# Allegro board AAF_TRANSFER_PCB.brd
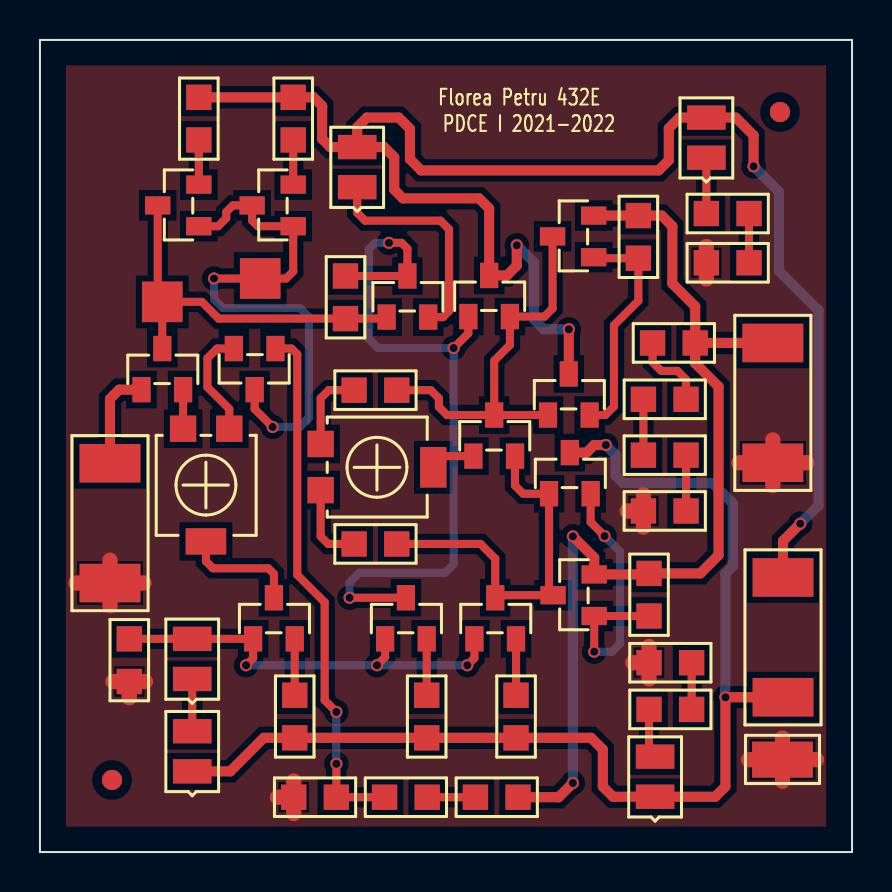
[diagram p0: board, top side]
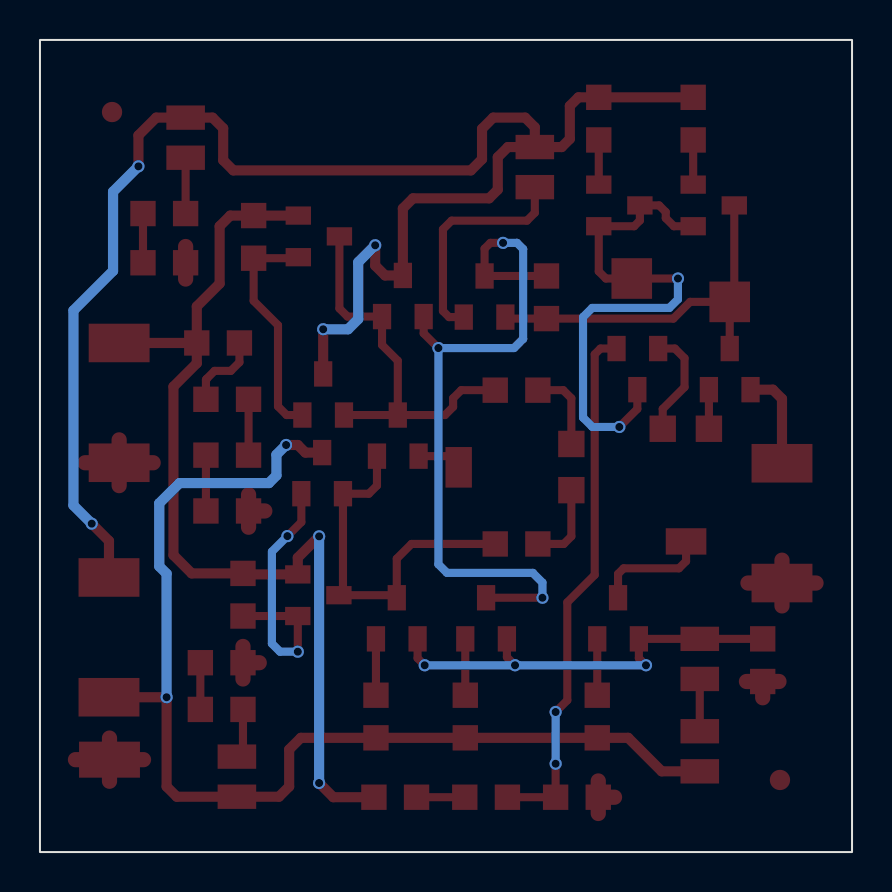
[diagram p1: board, bottom side, seen from below]

Outline 40.64 x 40.64 mm; copper layers: TOP, BOTTOM. Coordinates in mm from the lower left corner of the outline.
Outline path: rectangle 0,0 40.64,40.64

## Design rules (mm)
nets with their own width: min track width 0.406; nets N00911 N00918 N00925 N00933 N01224 N01228 N01235 N01242 N01246 N01250 N01277 N01281 N01296 N01395 N01399 N01446 N01522 N02165 N02372 N02396 N02732 N02736 N02740 N16944 N16948 N16962 N039361 N039811 N042490 N126500
nets with their own width: min track width 0.508; nets VCC VEE VIN VOUT
nets with their own width: min track width 0.762; nets GND

## Placement (name value [footprint] x y rotation side)
C1  47p  [SMC0805]  15.29 26.7 90 top
D1  1N4148  [SMD0805]  7.62 8.66 90 top
D2  1N4148  [SMD0805]  7.62 4.04 90 top
D3  1N4148  [SMD0805]  15.88 33.27 90 top
GND  CON1  [SMD_PAD_3-05_1-80#2]  37.16 4.62 0 top
LED1  OF-SMD2012B  [SMD0805]  33.35 34.75 90 top
LED2  OF-SMD2012B  [SMD0805]  30.78 2.77 90 top
NOREF  -  [unnamed]  3.61 3.61 0 top
NOREF#2  -  [#2]  40.64 0 90 top
NOREF#3  -  [#2]  0 40.64 0 top
NOREF#4  -  [unnamed]  37.03 37.03 0 top
PSU  CON2  [SMR2512]  37.19 13.74 270 top
Q1  QBC846B  [TO236AB]  5.08 23.14 270 top
Q2  QBC846B  [TO236AB]  11.79 25.2 90 top
Q3  QBC856B  [TO236AB]  17.35 26.77 270 top
Q4  QBC846B  [TO236AB]  21.44 26.8 270 top
Q5  QBC856B  [TO236AB]  7.95 31.32 0 top
Q6  QBC856B  [TO236AB]  12.67 31.32 0 top
Q7  QBC846B  [TO236AB]  10.67 10.67 270 top
Q8  QBC846B  [TO236AB]  17.27 10.67 270 top
Q9  QBC846B  [TO236AB]  21.74 10.67 270 top
Q10  QBC846B  [TO236AB]  21.69 19.81 270 top
Q11  QBC846B  [TO236AB]  27.71 29.77 0 top
Q12  QBC856B  [TO236AB]  27.74 11.81 0 top
Q13  QBC817-25  [TO236AB]  25.43 21.87 270 top
Q14  QBC807-25  [TO236AB]  25.48 17.93 270 top
R1  220  [SMR0805]  21.79 2.74 0 top
R2  680  [SMR0805]  17.25 2.74 0 top
R3  100  [SMR0805]  14.83 2.74 180 top
R4  51  [SMR0805]  7.95 37.77 270 top
R5  51  [SMR0805]  12.67 37.77 270 top
R6  100  [TS53YL]  7.16 21.18 90 top
R7  1k  [SMR0805]  12.75 7.85 270 top
R8  510  [SMR0805]  19.35 7.85 270 top
R9  220  [SMR0805]  23.83 7.85 270 top
R10  1  [SMR0805]  29.95 29.72 90 top
R11  1  [SMR0805]  30.48 13.94 270 top
R12  220  [SMR0805]  15.72 23.11 0 top
R13  500  [TS53YL]  14.05 18.11 180 top
R14  220  [SMR0805]  17.86 15.42 180 top
R15  2.2k  [SMR0805]  4.47 8.53 90 top
R16  10  [SMR0805]  32.79 25.48 180 top
R17  10  [SMR0805]  30.2 22.66 0 top
R18  10  [SMR0805]  30.2 19.86 0 top
R19  10  [SMR0805]  30.2 17.07 0 top
R20  220  [SMR0805]  33.35 31.95 0 top
R21  220  [SMR0805]  35.48 29.49 180 top
R22  220  [SMR0805]  32.61 7.14 180 top
R23  220  [SMR0805]  30.48 9.47 0 top
TS1  J5  [SMD_PAD_3-05_1-80]  6.12 27.53 0 top
TS2  J6  [SMD_PAD_3-05_1-80]  11.02 28.7 0 top
VIN  J1  [SMR2512]  3.51 19.46 270 top
VOUT  J2  [SMR2512]  36.68 25.48 270 top

## Library data of the parts
C1 = CAP NP
D1 D2 = DIODE_2
D3 = DIODE_1
GND TS1 TS2 = CON1
LED1 LED2 = LED_0
PSU VIN VOUT = CON2
Q1 Q4 Q7-Q11 Q13 = NPN BCE_0
Q2 = NPN BCE_1
Q3 Q5 Q6 Q12 Q14 = PNP BCE_0
R1-R5 R7-R12 R14-R23 = R2
R6 R13 = POT_1

## Footprints (pads in the part's own frame, mm; a bottom-side part is the same pattern mirrored in y, then rotated)
SMC0805
  rect 1.27x1.27 smd: 1(0,0) 2(2.134,0)
SMD0805
  rect 1.219x1.93 smd: A(2.007,0) C(0,0)
SMD_PAD_3-05_1-80
  rect 2.032x2.032 smd: 1(0,0)
SMD_PAD_3-05_1-80#2
  rect 3.048x1.803 smd: 1(0,0)
SMR0805
  rect 1.27x1.27 smd: 1(0,0) 2(2.134,0)
SMR2512
  rect 1.93x3.048 smd: 1(0,0) 2(5.994,0)
TO236AB
  rect 1.27x0.914 smd: 1(0,0) 2(0,2.083) 3(-2.057,1.041)
TS53YL
  rect 1.321x1.321 smd: 1(0,0) 3(0,-2.311)
  rect 1.321x2.032 smd: 2(-5.639,-1.143)
unnamed
  round 1.016 smd: (0,0)

## Nets
GND: GND.1 R3.2 R15.1 R19.1 R21.2 R23.1 VIN.2 VOUT.2
VCC: D3.A LED1.A(ANODE) PSU.1 Q4.3(C) Q13.3(C) R4.1 R5.1
VEE: D2.C LED2.C(CATHODE) PSU.2 Q14.3(C) R7.2 R8.2 R9.2
VIN: Q1.1(B) VIN.1
VOUT: Q11.2(E) Q12.2(E) R1.2 R10.2 R11.1 R16.1 VOUT.1
N00911: Q4.2(E) Q10.3(C) Q11.3(C) Q13.1(B) R12.2
N00918: Q9.3(C) Q10.2(E) Q12.3(C) Q14.1(B) R14.1
N00925: Q11.1(B) Q13.2(E) R10.1
N00933: Q12.1(B) Q14.2(E) R11.2
N01224: C1.1 Q1.3(C) Q3.1(B) Q5.3(C) TS1.1
N01228: Q1.2(E) R6.1(A)
N01235: Q2.2(E) R6.3(C)
N01242: Q2.3(C) Q5.1(B) Q6.1(B) Q6.3(C) TS2.1
N01246: Q6.2(E) R5.2
N01250: Q5.2(E) R4.2
N01277: Q7.3(C) R6.2(B)
N01281: D1.A Q7.1(B) Q8.1(B) Q9.1(B) R15.2
N01296: Q7.2(E) R7.1
N01395: C1.2 Q3.3(C) Q4.1(B) Q8.3(C)
N01399: Q8.2(E) R8.1
N01446: D1.C D2.A
N01522: Q9.2(E) R9.1
N02165: D3.C Q3.2(E)
N02372: Q2.1(B) R2.1 R3.1
N02396: R1.1 R2.2
N02732: R16.2 R17.2
N02736: R17.1 R18.1
N02740: R18.2 R19.2
N16944: R12.1 R13.3(C)
N16948: R13.1(A) R14.2
N16962: Q10.1(B) R13.2(B)
N039361: LED1.C(CATHODE) R20.1
N039811: R20.2 R21.1
N042490: LED2.A(ANODE) R22.2
N126500: R22.1 R23.2

## Via types
v1: diameter 0.61, hole 0.406, TOP to BOTTOM, 20 vias

## Routing (per net, layer and track width the routed paths; a pad name or vN(x,y) marks a point on that pad's centre or on a via; arc(x,y) is an arc through that point)
GND: length 28.3
  TOP w0.762: R23.1 30.48,10.29 ; R23.1 29.67,9.47 ; R23.1 30.48,8.66 ; 36.68,18.34 VOUT.2 ; VOUT.2 34.98,19.48 ; VOUT.2 38.38,19.48 ; VOUT.2 36.68,20.63 ; 35.46,4.62 GND.1 ; GND.1 37.16,3.54 ; GND.1 37.16,5.7 ; GND.1 38.86,4.62 ; 29.39,17.07 R19.1 ; R19.1 30.2,17.88 ; R19.1 30.2,16.26 ; 4.47,7.72 R15.1 ; R15.1 5.28,8.53 ; R15.1 3.66,8.53 ; 12.7,1.93 R3.2 ; R3.2 12.7,3.56 ; R3.2 11.89,2.74 ; 33.35,28.68 R21.2 33.35,30.3 ; VIN.2 5.21,13.46 ; VIN.2 3.51,12.32 ; VIN.2 3.51,14.61 ; VIN.2 1.8,13.46
VCC: length 82.6
  TOP w0.508: v1(35.71,34.32) 35.71,35.86 34.82,36.75 LED1.A 32,36.75 31.47,36.22 31.47,34.62 30.96,34.11 19.08,34.11 18.52,34.67 18.52,36.2 17.96,36.75 16.36,36.75 15.88,36.27 D3.A ; D3.A 17.22,35.28 17.73,34.77 17.73,33.15 18.16,32.72 21.97,32.72 22.48,32.21 Q4.3 23.37,28.85 23.86,29.35 v1(23.86,30.37) ; D3.A 14.53,35.28 14.12,35.69 14.12,37.34 13.69,37.77 R5.1 R4.1 ; Q13.3 v1(26.47,26.16) ; v1(38.05,16.43) 37.19,15.57 PSU.1
  BOTTOM w0.508: v1(23.86,30.37) 24.71,29.51 24.71,26.67 25.22,26.16 v1(26.47,26.16) ; v1(38.05,16.43) 38.96,17.35 38.96,27.1 36.98,29.08 36.98,33.05 v1(35.71,34.32)
VEE: length 57.2
  TOP w0.508: PSU.2 v1(34.3,7.75) 34.3,3.28 33.79,2.77 LED2.C 28.68,2.77 28.17,3.28 28.17,5.13 27.58,5.71 R9.2 R8.2 R7.2 11.2,5.71 9.53,4.04 D2.C ; Q14.3 27.36,19.99 27.74,20.37 v1(28.32,20.37)
  BOTTOM w0.508: v1(34.3,7.75) 34.3,13.93 34.67,14.3 34.67,17.45 33.66,18.47 29.18,18.47 28.81,18.84 28.81,19.89 v1(28.32,20.37)
VIN: length 5
  TOP w0.508: VIN.1 3.51,22.68 3.96,23.14 Q1.1
VOUT: length 49.8
  TOP w0.508: v1(26.67,15.8) 27.74,14.73 Q12.2 30.48,13.89 R11.1 33.05,13.94 33.96,14.86 33.96,23.29 32.79,24.46 R16.1 ; R16.1 VOUT.1 ; R16.1 32.79,27.3 31.65,28.45 31.65,31.32 31.11,31.85 R10.2 Q11.2 ; v1(26.67,3.45) 25.96,2.74 R1.2
  BOTTOM w0.508: v1(26.67,3.45) v1(26.67,15.8)
N00911: length 19.5
  TOP w0.406: R12.2 19.56,23.11 19.96,22.71 19.96,22.28 20.37,21.87 Q10.3 ; Q10.3 22.73,24.59 23.52,25.37 Q4.2 25.25,26.8 25.65,27.2 Q11.3 ; Q10.3 Q13.1
N00918: length 18.5
  TOP w0.406: Q9.3 22.78,12.85 ; 22.78,12.85 25.48,12.85 ; 22.78,12.85 22.78,14.68 22.05,15.42 R14.1 ; 25.48,12.85 Q14.1 24.18,17.93 23.77,18.34 Q10.2 ; 25.48,12.85 Q12.3
N00925: length 11.6
  TOP w0.406: Q13.2 28.3,21.87 28.73,22.3 28.73,26.37 29.95,27.58 R10.1 27.71,29.72 Q11.1
N00933: length 14.1
  TOP w0.406: R11.2 Q12.1 v1(27.74,10.03) ; v1(28.26,15.81) 27.56,16.51 27.56,17.93
  BOTTOM w0.406: v1(27.74,10.03) 28.63,10.03 29.03,10.43 29.03,15.04 v1(28.26,15.81)
N01224: length 19
  TOP w0.406: TS1.1 8.1,27.53 8.94,26.7 C1.1 17.35,26.7 Q3.1 ; TS1.1 5.89,27.53 Q5.3 ; TS1.1 Q1.3
N01228: length 2
  TOP w0.406: Q1.2 R6.1
N01235: length 5.5
  TOP w0.406: R6.3 9.47,22.17 8.38,23.27 8.38,24.71 8.86,25.2 Q2.2
N01242: length 28
  TOP w0.406: Q2.3 10.74,22.17 v1(11.65,21.27) ; v1(8.71,28.7) TS2.1 12.32,28.7 12.67,29.06 Q6.1 10.9,31.32 10.62,31.61 Q6.3 9.65,32.36 9.32,32.03 9.32,31.72 8.92,31.32 Q5.1
  BOTTOM w0.406: v1(8.71,28.7) 8.71,27.66 9.14,27.23 13,27.23 13.46,26.77 13.46,21.74 12.99,21.27 v1(11.65,21.27)
N01246: length 2.2
  TOP w0.406: R5.2 Q6.2
N01250: length 2.2
  TOP w0.406: R4.2 Q5.2
N01277: length 5.9
  TOP w0.406: R6.2 8.31,14.55 8.66,14.2 11.43,14.2 11.71,13.92 Q7.3
N01281: length 21.7
  TOP w0.406: v1(10.31,9.35) 10.67,9.7 Q7.1 D1.A R15.2 ; Q9.1 21.74,9.7 v1(21.39,9.35) ; v1(16.87,9.35) 17.27,9.75 Q8.1
  BOTTOM w0.406: v1(10.31,9.35) v1(16.87,9.35) v1(21.39,9.35)
N01296: length 2.8
  TOP w0.406: Q7.2 R7.1
N01395: length 37.4
  TOP w0.406: v1(15.49,12.73) Q8.3 ; v1(20.7,25.22) 21.44,25.96 Q4.1 ; C1.2 Q3.3 18.39,30.2 18.1,30.49 v1(17.46,30.49)
  BOTTOM w0.406: v1(15.49,12.73) 15.49,13.49 15.98,13.97 20.27,13.97 20.7,14.4 v1(20.7,25.22) 16.92,25.22 16.46,25.68 16.46,30.18 16.77,30.49 v1(17.46,30.49)
N01399: length 2.8
  TOP w0.406: Q8.2 R8.1
N01446: length 2.6
  TOP w0.406: D1.C D2.A
N01522: length 2.8
  TOP w0.406: Q9.2 R9.1
N02165: length 11.5
  TOP w0.406: 19.43,26.77 20.17,26.77 20.47,27.08 20.47,31.17 20.04,31.6 16.27,31.6 15.88,31.99 D3.C
N02372: length 26.6
  TOP w0.406: R2.1 R3.1 v1(14.83,4.42) ; Q2.1 12.59,25.2 12.88,24.91 12.88,13.87 14.25,12.5 14.25,7.59 v1(14.83,7.01)
  BOTTOM w0.406: v1(14.83,7.01) v1(14.83,4.42)
N02396: length 2.4
  TOP w0.406: R2.2 R1.1
N02732: length 4
  TOP w0.406: R16.2 30.66,24.51 31.09,24.08 31.9,24.08 32.31,23.67 32.31,23.65 32.33,23.62 R17.2
N02736: length 2.8
  TOP w0.406: R17.1 R18.1
N02740: length 2.8
  TOP w0.406: R18.2 R19.2
N16944: length 4.1
  TOP w0.406: R12.1 14.45,23.11 14.05,22.71 R13.3
N16948: length 4.1
  TOP w0.406: R14.2 14.43,15.42 14.05,15.8 R13.1
N16962: length 2.6
  TOP w0.406: 19.68,19.25 19.68,19.81 Q10.1
N039361: length 2.8
  TOP w0.406: LED1.C R20.1
N039811: length 2.5
  TOP w0.406: R20.2 R21.1
N042490: length 2.5
  TOP w0.406: LED2.A 30.48,5.08 R22.2
N126500: length 2.3
  TOP w0.406: R23.2 R22.1

## Copper pours and planes (outline as drawn; the poured copper is in the pictures)
GND on TOP: 1.3,39.37 1.3,1.27 39.34,1.27 39.34,39.37 ; 1 cut-out

## Text on the board
Ref Des/Silkscreen Top: Florea Petru 432E | PDCE I 2021-2022
XSECTION_CHART: *  SURFACE - AIR 0 MIL | L1: TOP CONDUCTOR - COPPER 0.72 MIL | *  DIELECTRIC - FR-4 58.56 MIL | L2: BOTTOM CONDUCTOR - COPPER 0.72 MIL | DESIGN CROSS SECTION CHART | ___________________________ | TOTAL THICKNESS 60 MIL | 1-2 | FIGURE | SIZE | 16.0 | DRILL CHART: TOP to BOTTOM | ALL UNITS ARE IN MILS | PLATED | QTY | 20
